# EAGLE board FCM2.1_Manuf (EAGLE 5.11), part 1 of 5
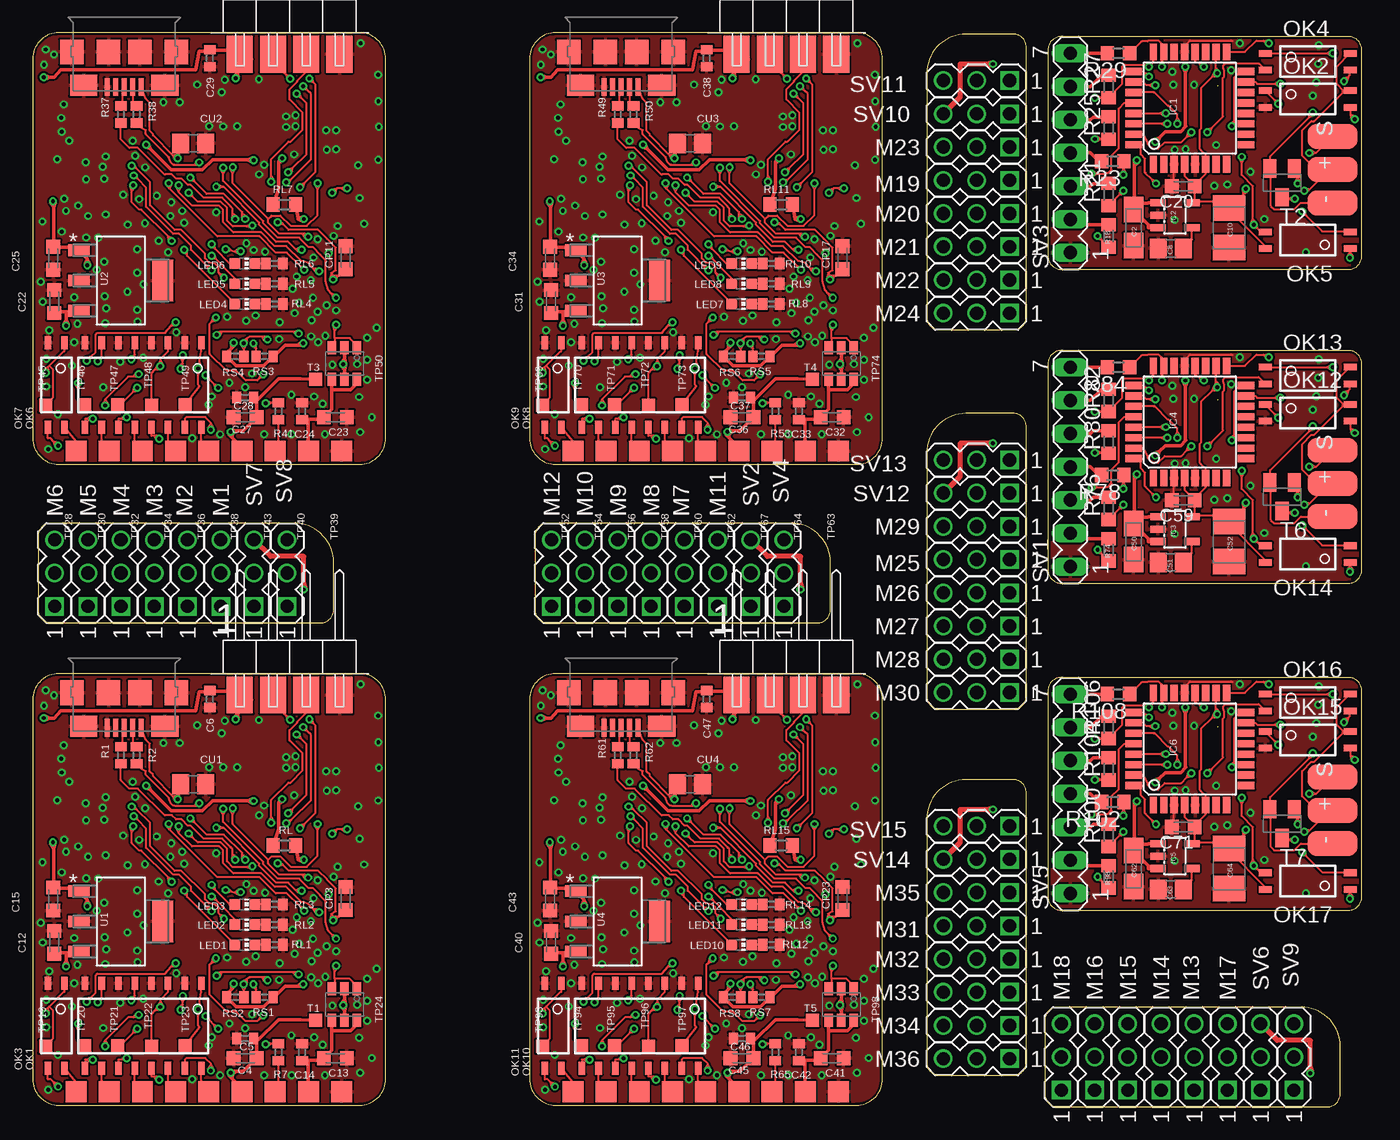
[diagram p0: board, top side]
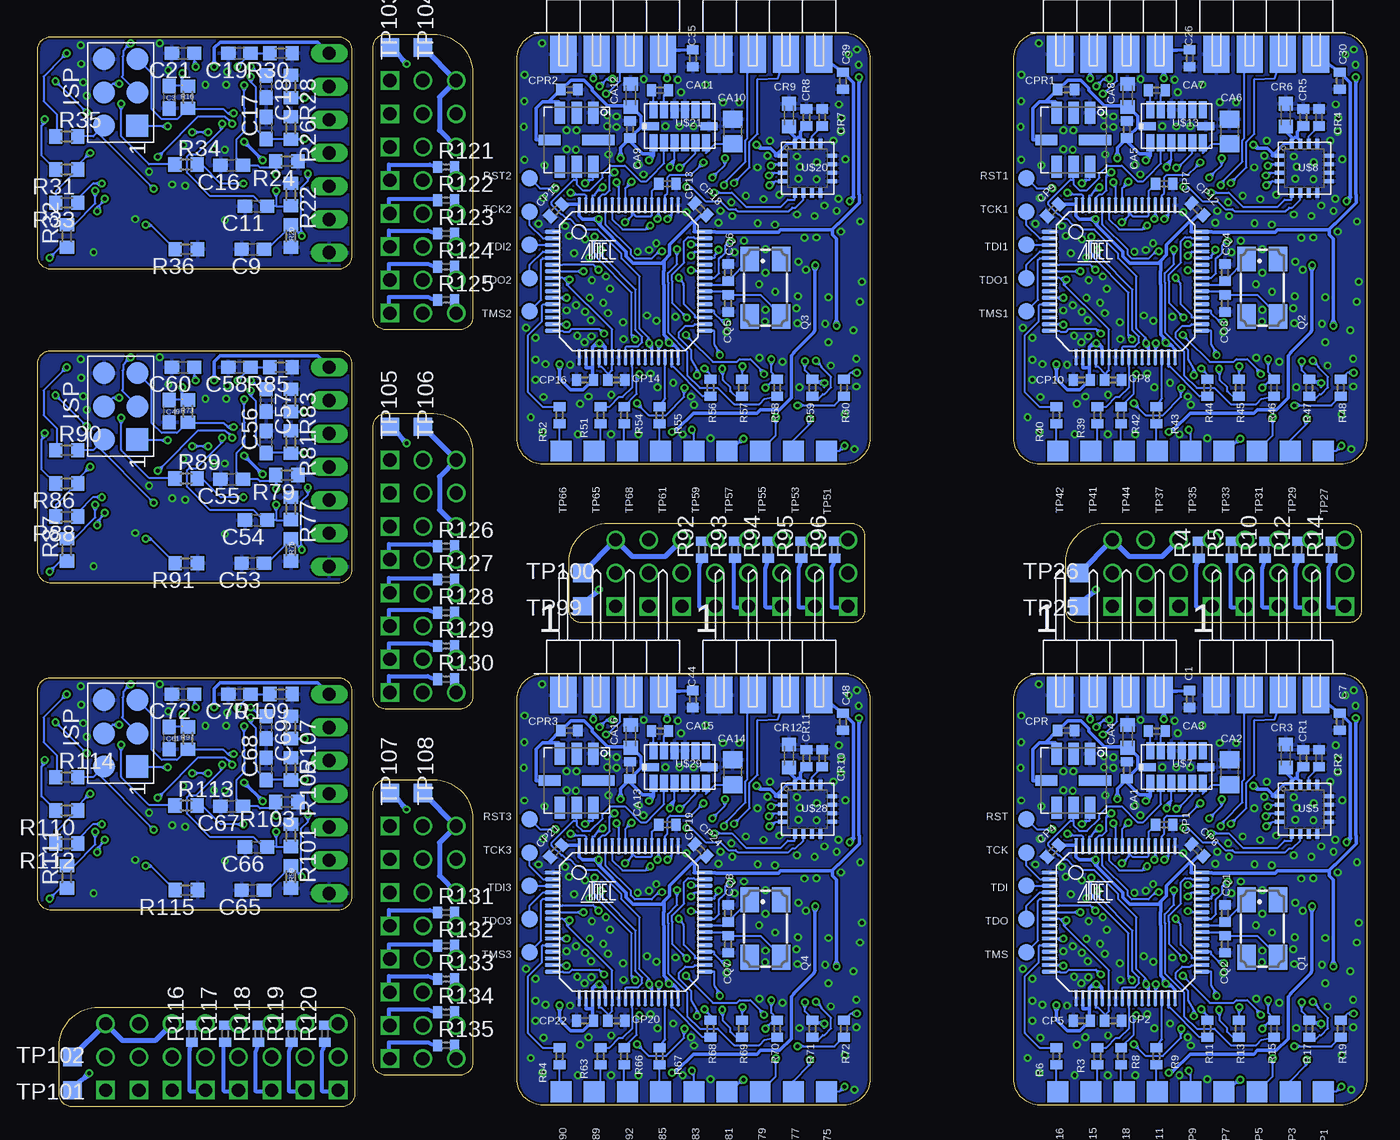
[diagram p1: board, bottom side, seen from below]

Size 101.66 x 82.12 mm. Coordinates in mm from the lower left corner, seen from the top.
Outline: 22.02,37 arc90 23.02,38 23.02,41.62 arc90 20.02,44.62 1.41,44.62 arc90 0.41,43.62 0.41,38 arc90 1.41,37 22.02,37
Outline: 101.66,80.82 arc90 100.66,81.82 78.65,81.82 arc90 77.65,80.82 77.65,65.04 arc90 78.65,64.04 100.66,64.04 arc90 101.66,65.04 101.66,80.82
Outline: 0,2.12 arc90 2,0.12 25,0.12 arc90 27,2.12 27,31.12 arc90 25,33.12 2,33.12 arc90 0,31.12 0,2.12
Outline: 0,51.12 arc90 2,49.12 25,49.12 arc90 27,51.12 27,80.12 arc90 25,82.12 2,82.12 arc90 0,80.12 0,51.12
Outline: 38,51.12 arc90 40,49.12 63,49.12 arc90 65,51.12 65,80.12 arc90 63,82.12 40,82.12 arc90 38,80.12 38,51.12
Outline: 38,2.12 arc90 40,0.12 63,0.12 arc90 65,2.12 65,31.12 arc90 63,33.12 40,33.12 arc90 38,31.12 38,2.12
Outline: 101.66,56.82 arc90 100.66,57.82 78.65,57.82 arc90 77.65,56.82 77.65,41.04 arc90 78.65,40.04 100.66,40.04 arc90 101.66,41.04 101.66,56.82
Outline: 60.02,37 arc90 61.02,38 61.02,41.62 arc90 58.02,44.62 39.41,44.62 arc90 38.41,43.62 38.41,38 arc90 39.41,37 60.02,37
Outline: 101.66,31.82 arc90 100.66,32.82 78.65,32.82 arc90 77.65,31.82 77.65,16.04 arc90 78.65,15.04 100.66,15.04 arc90 101.66,16.04 101.66,31.82
Outline: 99.02,0 arc90 100.02,1 100.02,4.62 arc90 97.02,7.62 78.41,7.62 arc90 77.41,6.62 77.41,1 arc90 78.41,0 99.02,0
Outline: 76,81.02 arc90 75,82.02 71.38,82.02 arc90 68.38,79.02 68.38,60.41 arc90 69.38,59.41 75,59.41 arc90 76,60.41 76,81.02
Outline: 76,52.02 arc90 75,53.02 71.38,53.02 arc90 68.38,50.02 68.38,31.41 arc90 69.38,30.41 75,30.41 arc90 76,31.41 76,52.02
Outline: 76,24.02 arc90 75,25.02 71.38,25.02 arc90 68.38,22.02 68.38,3.41 arc90 69.38,2.41 75,2.41 arc90 76,3.41 76,24.02
Copper layers (1*16): Top 0.035mm / dielectric 1.5mm / Bottom 0.035mm
Design rules "Fischer-LP_BGA": minimum track width 0.15mm, minimum drill 0.3mm, track to track 0.15mm, track to pad 0.15mm, pad to pad 0.15mm, via to via 0.15mm, smd to smd 0mil, copper to edge 0.2mm, drill to drill 0.3mm, minimum pad ring 0.2mm, minimum via ring 0.15mm, stop-mask expansion 0.05mm, vias tented up to drill 0.5mm, thermal gap 0.15mm
Net classes: 1 power: width 0.25 mm; 2 isol: width 0.15 mm, clearance 0.5 mm to class 0, clearance 0.5 mm to class 1

## Footprints (pad centres in the part's own frame; a part is rotated, then mirrored left to right if it is on the bottom)
C0402 = smd 0.7 x 0.9: 1 -0.65,0; 2 0.65,0
A/3216-18R = smd 1.95 x 1.5: + 1.375,0; - -1.375,0
C0603 = smd 1.1 x 1: 1 -0.85,0; 2 0.85,0
C0603K = smd 1.05 x 1.08: 1 -0.875,0; 2 0.875,0
C0805 = smd 1.3 x 1.5: 1 -0.95,0; 2 0.95,0
B/3528-21R = smd 1.95 x 2.5: + 1.525,0; - -1.525,0
TQFP32-08 = smd 1.27 x 0.559: 1 -4.293,2.8; 2 -4.293,2; 3 -4.293,1.2; 4 -4.293,0.4; 5 -4.293,-0.4; 6 -4.293,-1.2; 7 -4.293,-2; 8 -4.293,-2.8; 17 4.293,-2.8; 18 4.293,-2; 19 4.293,-1.2; 20 4.293,-0.4; 21 4.293,0.4; 22 4.293,1.2; 23 4.293,2; 24 4.293,2.8 | smd 0.559 x 1.27: 9 -2.8,-4.293; 10 -2,-4.293; 11 -1.2,-4.293; 12 -0.4,-4.293; 13 0.4,-4.293; 14 1.2,-4.293; 15 2,-4.293; 16 2.8,-4.293; 25 2.8,4.293; 26 2,4.293; 27 1.2,4.293; 28 0.4,4.293; 29 -0.4,4.293; 30 -1.2,4.293; 31 -2,4.293; 32 -2.8,4.293
SOT23-5 = smd 0.55 x 1.2: 1 -0.95,-1.3; 2 0,-1.3; 3 0.95,-1.3; 4 0.95,1.3; 5 -0.95,1.3
3WIRE_CONN = smd 1.905 x 3.81: 0V -2.54,0; 5V 0,0; SIG 2.54,0
CHIP-LED0603 = smd 0.8 x 0.8: A 0,-0.75; C 0,0.75
MA03-1 = drill 1.016 square: 1 -2.54,0 | drill 1.016 round: 2 0,0; 3 2.54,0
MINI-FLAT-16 = smd 1 x 0.5: 1 -3.24,4.445; 2 -3.24,3.175; 3 -3.24,1.905; 4 -3.24,0.635; 5 -3.24,-0.635; 6 -3.24,-1.905; 7 -3.24,-3.175; 8 -3.24,-4.445; 9 3.24,-4.445; 10 3.24,-3.175; 11 3.24,-1.905; 12 3.24,-0.635; 13 3.24,0.635; 14 3.24,1.905; 15 3.24,3.175; 16 3.24,4.445
MINI-FLAT-4 = smd 1 x 0.5: 1 -3.24,0.635; 2 -3.24,-0.635; 3 3.24,-0.635; 4 3.24,0.635
CTS406 = smd 1.9 x 1.4: 1 -2.2,-1.2; 2 2.2,-1.2; 3 2.2,1.2; 4 -2.2,1.2
R0402 = smd 0.7 x 0.9: 1 -0.65,0; 2 0.65,0
R0603 = smd 1 x 1.1: 1 -0.85,0; 2 0.85,0
B1,27 = smd 1.27 x 1.27: TP 0,0
MA07-1 = drill 1.016 long: 1 -7.62,0; 2 -5.08,0; 3 -2.54,0; 4 0,0; 5 2.54,0; 6 5.08,0; 7 7.62,0
SUPERSOT-6 = smd 0.65 x 1: P$1 -0.95,-1.2; P$2 0,-1.2; P$3 0.95,-1.2; P$4 0.95,1.2; P$5 0,1.2; P$6 -0.95,1.2
SOT23-BEC = smd 1 x 1.4: B -0.95,-1.1; C 0,1.1; E 0.95,-1.1
TP16SQ = smd 1.6 x 1.6: TP 0,0
TP10SQ = smd 1 x 1: TP 0,0
TP14SQ = smd 1.4 x 1.4: TP 0,0
SOT230P700X180-4N = smd 1.626 x 0.889: 1 -3.2,2.311; 2 -3.2,0; 3 -3.2,-2.311 | smd 1.626 x 3.175: 4 3.2,0
JEDEC_MS-026 = smd 1.2 x 0.27: P1 -6.06,3.535; P2 -6.06,3.03; P3 -6.06,2.525; P4 -6.06,2.02; P5 -6.06,1.515; P6 -6.06,1.01; P7 -6.06,0.505; P8 -6.06,0; P9 -6.06,-0.505; P10 -6.06,-1.01; P11 -6.06,-1.515; P12 -6.06,-2.02; P13 -6.06,-2.525; P14 -6.06,-3.03; P15 -6.06,-3.535; P16 -6.06,-4.04; P33 5.555,-4.04; P34 5.555,-3.535; P35 5.555,-3.03; P36 5.555,-2.525; P37 5.555,-2.02; P38 5.555,-1.515; P39 5.555,-1.01; P40 5.555,-0.505; P41 5.555,0; P42 5.555,0.505; P43 5.555,1.01; P44 5.555,1.515; P45 5.555,2.02; P46 5.555,2.525; P47 5.555,3.03; P48 5.555,3.535 | smd 0.27 x 1.2: P17 -4.04,-6.06; P18 -3.535,-6.06; P19 -3.03,-6.06; P20 -2.525,-6.06; P21 -2.02,-6.06; P22 -1.515,-6.06; P23 -1.01,-6.06; P24 -0.505,-6.06; P25 0,-6.06; P26 0.505,-6.06; P27 1.01,-6.06; P28 1.515,-6.06; P29 2.02,-6.06; P30 2.525,-6.06; P31 3.03,-6.06; P32 3.535,-6.06; P49 3.535,5.555; P50 3.03,5.555; P51 2.525,5.555; P52 2.02,5.555; P53 1.515,5.555; P54 1.01,5.555; P55 0.505,5.555; P56 0,5.555; P57 -0.505,5.555; P58 -1.01,5.555; P59 -1.515,5.555; P60 -2.02,5.555; P61 -2.525,5.555; P62 -3.03,5.555; P63 -3.535,5.555; P64 -4.04,5.555
ISP_SMD = smd 1.7 x 1.7: 5V -2.54,1.27; GND 2.54,1.27; MISO -2.54,-1.27; MOSI 0,1.27; RESET 2.54,-1.27; SCK 0,-1.27
USB_MICRO = smd 0.4 x 1.35: P$1 3.6,4.125; P$2 4.25,4.125; P$3 4.9,4.125; P$4 5.55,4.125; P$5 6.2,4.125 | smd 1.8 x 1.9: P$6 0.9,1.45; P$7 3.7,1.45; P$8 6.1,1.45; P$9 8.9,1.45 | smd 2.1 x 1.6: P$10 1.8,4; P$11 8,4
LGA16_HAND = smd 0.75 x 0.3: 1 0.125,2.975; 2 0.125,2.325; 3 0.125,1.675; 4 0.125,1.025; 9 3.875,1.025; 10 3.875,1.675; 11 3.875,2.325; 12 3.875,2.975 | smd 0.3 x 0.75: 5 1.025,0.125; 6 1.675,0.125; 7 2.325,0.125; 8 2.975,0.125; 13 2.975,3.875; 14 2.325,3.875; 15 1.675,3.875; 16 1.025,3.875
LGA14_HAND = smd 1.3 x 0.6: 1 -1.25,1.4; 2 -1.25,0.6; 3 -1.25,-0.2; 4 -1.25,-1; 5 -1.25,-1.8; 6 -1.25,-2.6; 8 1.25,-2.6; 9 1.25,-1.8; 10 1.25,-1; 11 1.25,-0.2; 12 1.25,0.6; 13 1.25,1.4 | smd 0.6 x 1.3: 7 0,-2.85; 14 0,1.65
BMP085 = smd 1.67 x 0.8: 1 -2.065,1.27; 2 -2.065,0; 3 -2.065,-1.27; 5 2.065,-1.27; 6 2.065,0; 7 2.065,1.27 | smd 0.8 x 1.67: 4 0,-2.065 | smd 0.8 x 2.5: 8 0,1.65
4WIRE_PIN = smd 2 x 2.8: 1 -2.54,0.254; 2 0,0.254; 3 2.54,0.254; 4 5.08,0.254

## Placement (x,y rotation side)
C1  100n  [C0402]  13.55,31.18 270 bottom
C2  1µ  [A/3216-18R]  84.19,67.21 90 top
C3  100nF  [C0603]  91.59,77.19 270 bottom
C4  2.2uF  [C0603K]  16.25,3.73 180 top
C5  100n  [C0402]  16.25,5.22 180 top
C6  100n  [C0402]  13.55,31.18 270 top
C7  100n  [C0402]  2.06,29.45 270 bottom
C8  470pF  [C0805]  87.05,65.63 180 top
C9  100nF  [C0603]  85.21,65.56 180 bottom
C10  2,2µ  [B/3528-21R]  91.5,67.21 90 top
C11  100nF  [C0603]  84.95,68.87 180 bottom
C12  2.2uF  [C0603K]  1.65,12.57 90 top
C13  2.2uF  [C0603K]  23.15,3.73 0 top
C14  100n  [C0402]  20.6,4.17 90 top
C15  2.2uF  [C0603K]  1.58,15.88 270 top
C16  100nF  [C0603]  86.83,71.99 180 bottom
C17  100nF  [C0603]  84.19,74.83 90 bottom
C18  100nF  [C0603]  84.19,78.01 270 bottom
C19  100nF  [C0603]  86.22,80.55 180 bottom
C20  100nF  [C0603K]  88,70.39 180 top
C21  100nF  [C0603]  90.54,80.55 180 bottom
C22  2.2uF  [C0603K]  1.65,61.58 90 top
C23  2.2uF  [C0603K]  23.15,52.73 0 top
C24  100n  [C0402]  20.6,53.17 90 top
C25  2.2uF  [C0603K]  1.58,64.88 270 top
C26  100n  [C0402]  13.55,80.17 270 bottom
C27  2.2uF  [C0603K]  16.25,52.73 180 top
C28  100n  [C0402]  16.25,54.23 180 top
C29  100n  [C0402]  13.55,80.17 270 top
C30  100n  [C0402]  2.06,78.45 270 bottom
C31  2.2uF  [C0603K]  39.65,61.58 90 top
C32  2.2uF  [C0603K]  61.15,52.73 0 top
C33  100n  [C0402]  58.6,53.17 90 top
C34  2.2uF  [C0603K]  39.58,64.88 270 top
C35  100n  [C0402]  51.55,80.17 270 bottom
C36  2.2uF  [C0603K]  54.25,52.73 180 top
C37  100n  [C0402]  54.25,54.23 180 top
C38  100n  [C0402]  51.55,80.17 270 top
C39  100n  [C0402]  40.06,78.45 270 bottom
C40  2.2uF  [C0603K]  39.65,12.57 90 top
C41  2.2uF  [C0603K]  61.15,3.73 0 top
C42  100n  [C0402]  58.6,4.17 90 top
C43  2.2uF  [C0603K]  39.58,15.88 270 top
C44  100n  [C0402]  51.55,31.18 270 bottom
C45  2.2uF  [C0603K]  54.25,3.73 180 top
C46  100n  [C0402]  54.25,5.22 180 top
C47  100n  [C0402]  51.55,31.18 270 top
C48  100n  [C0402]  40.06,29.45 270 bottom
C49  100nF  [C0603]  91.59,53.19 270 bottom
C50  1µ  [A/3216-18R]  84.19,43.21 90 top
C51  470pF  [C0805]  87.05,41.63 180 top
C52  2,2µ  [B/3528-21R]  91.5,43.21 90 top
C53  100nF  [C0603]  85.21,41.56 180 bottom
C54  100nF  [C0603]  84.95,44.87 180 bottom
C55  100nF  [C0603]  86.83,47.99 180 bottom
C56  100nF  [C0603]  84.19,50.83 90 bottom
C57  100nF  [C0603]  84.19,54.01 270 bottom
C58  100nF  [C0603]  86.22,56.55 180 bottom
C59  100nF  [C0603K]  88,46.39 180 top
C60  100nF  [C0603]  90.54,56.55 180 bottom
C61  100nF  [C0603]  91.59,28.19 270 bottom
C62  1µ  [A/3216-18R]  84.19,18.21 90 top
C63  470pF  [C0805]  87.05,16.63 180 top
C64  2,2µ  [B/3528-21R]  91.5,18.21 90 top
C65  100nF  [C0603]  85.21,16.56 180 bottom
C66  100nF  [C0603]  84.95,19.87 180 bottom
C67  100nF  [C0603]  86.83,22.99 180 bottom
C68  100nF  [C0603]  84.19,25.83 90 bottom
C69  100nF  [C0603]  84.19,29.01 270 bottom
C70  100nF  [C0603]  86.22,31.55 180 bottom
C71  100nF  [C0603K]  88,21.39 180 top
C72  100nF  [C0603]  90.54,31.55 180 bottom
CA1  100n  [C0402]  18.35,25.73 90 bottom
CA2  4µ7  [C0805]  10.5,25.57 90 bottom
CA3  220n  [C0402]  16.05,28.73 0 bottom
CA4  2.2uF  [C0603K]  18.3,28.32 90 bottom
CA5  100n  [C0402]  18.35,74.72 90 bottom
CA6  4µ7  [C0805]  10.5,74.58 90 bottom
CA7  220n  [C0402]  16.05,77.72 0 bottom
CA8  2.2uF  [C0603K]  18.3,77.33 90 bottom
CA9  100n  [C0402]  56.35,74.72 90 bottom
CA10  4µ7  [C0805]  48.5,74.58 90 bottom
CA11  220n  [C0402]  54.05,77.72 0 bottom
CA12  2.2uF  [C0603K]  56.3,77.33 90 bottom
CA13  100n  [C0402]  56.35,25.73 90 bottom
CA14  4µ7  [C0805]  48.5,25.57 90 bottom
CA15  220n  [C0402]  54.05,28.73 0 bottom
CA16  2.2uF  [C0603K]  56.3,28.32 90 bottom
CP1  100n  [C0402]  15.5,21.57 0 bottom
CP2  100n  [C0402]  19.4,6.58 0 bottom
CP3  2.2uF  [C0603K]  23.94,15.92 90 top
CP4  100n  [C0402]  24.01,19.56 225 bottom
CP5  100n  [C0402]  21.8,6.58 180 bottom
CP6  100n  [C0402]  12.95,19.62 135 bottom
CP7  100n  [C0402]  15.5,70.58 0 bottom
CP8  100n  [C0402]  19.4,55.58 0 bottom
CP9  100n  [C0402]  24.01,68.56 225 bottom
CP10  100n  [C0402]  21.8,55.58 180 bottom
CP11  2.2uF  [C0603K]  23.94,64.92 90 top
CP12  100n  [C0402]  12.95,68.62 135 bottom
CP13  100n  [C0402]  53.5,70.58 0 bottom
CP14  100n  [C0402]  57.4,55.58 0 bottom
CP15  100n  [C0402]  62.01,68.56 225 bottom
CP16  100n  [C0402]  59.8,55.58 180 bottom
CP17  2.2uF  [C0603K]  61.94,64.92 90 top
CP18  100n  [C0402]  50.95,68.62 135 bottom
CP19  100n  [C0402]  53.5,21.57 0 bottom
CP20  100n  [C0402]  57.4,6.58 0 bottom
CP21  100n  [C0402]  62.01,19.56 225 bottom
CP22  100n  [C0402]  59.8,6.58 180 bottom
CP23  2.2uF  [C0603K]  61.94,15.92 90 top
CP24  100n  [C0402]  50.95,19.62 135 bottom
CPR  100n  [C0402]  23,28.77 0 bottom
CPR1  100n  [C0402]  23,77.78 0 bottom
CPR2  100n  [C0402]  61,77.78 0 bottom
CPR3  100n  [C0402]  61,28.77 0 bottom
CQ1  18pF  [C0402]  10.85,14.79 270 bottom
CQ2  18pF  [C0402]  10.85,12.43 90 bottom
CQ3  18pF  [C0402]  10.85,61.42 90 bottom
CQ4  18pF  [C0402]  10.85,63.78 270 bottom
CQ5  18pF  [C0402]  48.85,61.42 90 bottom
CQ6  18pF  [C0402]  48.85,63.78 270 bottom
CQ7  18pF  [C0402]  48.85,12.43 90 bottom
CQ8  18pF  [C0402]  48.85,14.79 270 bottom
CR1  100n  [C0402]  4.85,26.64 90 bottom
CR2  10n 25V  [C0402]  3.65,26.64 270 bottom
CR3  2.2uF  [C0603K]  6.2,26.82 90 bottom
CR4  10n 25V  [C0402]  3.65,75.64 270 bottom
CR5  100n  [C0402]  4.85,75.64 90 bottom
CR6  2.2uF  [C0603K]  6.2,75.83 90 bottom
CR7  10n 25V  [C0402]  41.65,75.64 270 bottom
CR8  100n  [C0402]  42.85,75.64 90 bottom
CR9  2.2uF  [C0603K]  44.2,75.83 90 bottom
CR10  10n 25V  [C0402]  41.65,26.64 270 bottom
CR11  100n  [C0402]  42.85,26.64 90 bottom
CR12  2.2uF  [C0603K]  44.2,26.82 90 bottom
CU1  4µ7  [C0805]  12.27,24.66 0 top
CU2  4µ7  [C0805]  12.27,73.67 0 top
CU3  4µ7  [C0805]  50.27,73.67 0 top
CU4  4µ7  [C0805]  50.27,24.66 0 top
IC1  MEGA8-AI  [TQFP32-08]  88.51,76.36 90 top
IC2  IRU1205_30 / LP3985-3.3  [SOT23-5]  87.37,68.17 270 top
IC3  IRU1205_30 / LP3985-3.3  [SOT23-5]  87.37,44.17 270 top
IC4  MEGA8-AI  [TQFP32-08]  88.51,52.36 90 top
IC5  IRU1205_30 / LP3985-3.3  [SOT23-5]  87.37,19.17 270 top
IC6  MEGA8-AI  [TQFP32-08]  88.51,27.36 90 top
IN1  [3WIRE_CONN]  99.43,47.66 90 top
IN2  [3WIRE_CONN]  99.43,22.66 90 top
IN3  [3WIRE_CONN]  99.43,71.66 90 top
LED1  red  [CHIP-LED0603]  16.23,12.38 270 top
LED2  green  [CHIP-LED0603]  16.23,13.93 270 top
LED3  blue  [CHIP-LED0603]  16.23,15.47 270 top
LED4  red  [CHIP-LED0603]  16.23,61.38 270 top
LED5  green  [CHIP-LED0603]  16.23,62.93 270 top
LED6  blue  [CHIP-LED0603]  16.23,64.47 270 top
LED7  red  [CHIP-LED0603]  54.23,61.38 270 top
LED8  green  [CHIP-LED0603]  54.23,62.93 270 top
LED9  blue  [CHIP-LED0603]  54.23,64.47 270 top
LED10  red  [CHIP-LED0603]  54.23,12.38 270 top
LED11  green  [CHIP-LED0603]  54.23,13.93 270 top
LED12  blue  [CHIP-LED0603]  54.23,15.47 270 top
M1  [MA03-1]  14.38,40.81 90 top
M2  [MA03-1]  11.84,40.81 90 top
M3  [MA03-1]  9.3,40.81 90 top
M4  [MA03-1]  6.76,40.81 90 top
M5  [MA03-1]  4.22,40.81 90 top
M6  [MA03-1]  1.68,40.81 90 top
M7  [MA03-1]  49.84,40.81 90 top
M8  [MA03-1]  47.3,40.81 90 top
M9  [MA03-1]  44.76,40.81 90 top
M10  [MA03-1]  42.22,40.81 90 top
M11  [MA03-1]  52.38,40.81 90 top
M12  [MA03-1]  39.68,40.81 90 top
M13  [MA03-1]  88.84,3.81 90 top
M14  [MA03-1]  86.3,3.81 90 top
M15  [MA03-1]  83.76,3.81 90 top
M16  [MA03-1]  81.22,3.81 90 top
M17  [MA03-1]  91.38,3.81 90 top
M18  [MA03-1]  78.68,3.81 90 top
M19  [MA03-1]  72.19,70.84 180 top
M20  [MA03-1]  72.19,68.3 180 top
M21  [MA03-1]  72.19,65.76 180 top
M22  [MA03-1]  72.19,63.22 180 top
M23  [MA03-1]  72.19,73.38 180 top
M24  [MA03-1]  72.19,60.68 180 top
M25  [MA03-1]  72.19,41.84 180 top
M26  [MA03-1]  72.19,39.3 180 top
M27  [MA03-1]  72.19,36.76 180 top
M28  [MA03-1]  72.19,34.22 180 top
M29  [MA03-1]  72.19,44.38 180 top
M30  [MA03-1]  72.19,31.68 180 top
M31  [MA03-1]  72.19,13.84 180 top
M32  [MA03-1]  72.19,11.3 180 top
M33  [MA03-1]  72.19,8.76 180 top
M34  [MA03-1]  72.19,6.22 180 top
M35  [MA03-1]  72.19,16.38 180 top
M36  [MA03-1]  72.19,3.68 180 top
OK1  TLP283-4  [MINI-FLAT-16]  8.46,6.19 270 top
OK2  TLP283  [MINI-FLAT-4]  97.53,77.06 0 top
OK3  TLP283  [MINI-FLAT-4]  1.8,6.19 270 top
OK4  TLP283  [MINI-FLAT-4]  97.53,79.91 0 top
OK5  TLP283  [MINI-FLAT-4]  97.53,66.26 180 top
OK6  TLP283-4  [MINI-FLAT-16]  8.46,55.19 270 top
OK7  TLP283  [MINI-FLAT-4]  1.8,55.19 270 top
OK8  TLP283-4  [MINI-FLAT-16]  46.45,55.19 270 top
OK9  TLP283  [MINI-FLAT-4]  39.8,55.19 270 top
OK10  TLP283-4  [MINI-FLAT-16]  46.45,6.19 270 top
OK11  TLP283  [MINI-FLAT-4]  39.8,6.19 270 top
OK12  TLP283  [MINI-FLAT-4]  97.53,53.06 0 top
OK13  TLP283  [MINI-FLAT-4]  97.53,55.91 0 top
OK14  TLP283  [MINI-FLAT-4]  97.53,42.26 180 top
OK15  TLP283  [MINI-FLAT-4]  97.53,28.06 0 top
OK16  TLP283  [MINI-FLAT-4]  97.53,30.91 0 top
OK17  TLP283  [MINI-FLAT-4]  97.53,17.26 180 top
Q1  8MHz  [CTS406]  8,13.62 270 bottom
Q2  8MHz  [CTS406]  8,62.62 270 bottom
Q3  8MHz  [CTS406]  46,62.62 270 bottom
Q4  8MHz  [CTS406]  46,13.62 270 bottom
R1  39  [R0402]  6.75,26.88 90 top
R2  39  [R0402]  7.95,26.88 90 top
R3  2k2  [R0402]  20.6,3.88 270 bottom
R4  [R0402]  12.86,42.59 90 bottom
R5  [R0402]  10.32,42.59 90 bottom
R6  2k2  [R0402]  23.75,3.88 270 bottom
R7  2k2  [R0402]  18.8,4.17 270 top
R8  2k2  [R0402]  18.8,3.88 270 bottom
R9  2k2  [R0402]  16.1,3.88 270 bottom
R10  [R0402]  7.78,42.59 90 bottom
R11  330  [R0402]  12.2,5.97 90 bottom
R12  [R0402]  5.24,42.59 90 bottom
R13  330  [R0402]  9.8,5.97 90 bottom
R14  [R0402]  2.7,42.59 90 bottom
R15  330  [R0402]  7.1,5.97 90 bottom
R16  10k  [R0603]  90.17,77.19 90 bottom
R17  330  [R0402]  4.4,5.97 90 bottom
R18  10k  [R0603]  82.29,66.58 90 top
R19  330  [R0402]  2,5.97 90 bottom
R20  10k  [R0603]  82.29,66.58 90 bottom
R21  10k  [R0603]  82.29,69.75 90 top
R22  10k  [R0603]  82.29,69.75 270 bottom
R23  10k  [R0603]  82.61,72.29 180 top
R24  10k  [R0603]  82.61,72.29 180 bottom
R25  10k  [R0603]  82.29,74.83 90 top
R26  10k  [R0603]  82.29,74.83 270 bottom
R27  10k  [R0603]  82.29,78.01 90 top
R28  10k  [R0603]  82.29,78.01 270 bottom
R29  10k  [R0603]  83.05,80.55 180 top
R30  10k  [R0603]  83.05,80.55 180 bottom
R31  2k2  [R0603]  99.43,71.66 180 bottom
R32  470  [R0603]  99.43,66.58 90 bottom
R33  47k  [R0603]  99.43,69.12 180 bottom
R34  470  [R0603]  90.31,72.04 0 bottom
R35  470  [R0603]  99.43,74.2 0 bottom
R36  10k  [R0603]  90.29,65.56 180 bottom
R37  39  [R0402]  6.75,75.88 90 top
R38  39  [R0402]  7.95,75.88 90 top
R39  2k2  [R0402]  20.6,52.88 270 bottom
R40  2k2  [R0402]  23.75,52.88 270 bottom
R41  2k2  [R0402]  18.8,53.17 270 top
R42  2k2  [R0402]  18.8,52.88 270 bottom
R43  2k2  [R0402]  16.1,52.88 270 bottom
R44  330  [R0402]  12.2,54.98 90 bottom
R45  330  [R0402]  9.8,54.98 90 bottom
R46  330  [R0402]  7.1,54.98 90 bottom
R47  330  [R0402]  4.4,54.98 90 bottom
R48  330  [R0402]  2,54.98 90 bottom
R49  39  [R0402]  44.75,75.88 90 top
R50  39  [R0402]  45.95,75.88 90 top
R51  2k2  [R0402]  58.6,52.88 270 bottom
R52  2k2  [R0402]  61.75,52.88 270 bottom
R53  2k2  [R0402]  56.8,53.17 270 top
R54  2k2  [R0402]  56.8,52.88 270 bottom
R55  2k2  [R0402]  54.1,52.88 270 bottom
R56  330  [R0402]  50.2,54.98 90 bottom
R57  330  [R0402]  47.8,54.98 90 bottom
R58  330  [R0402]  45.1,54.98 90 bottom
R59  330  [R0402]  42.4,54.98 90 bottom
R60  330  [R0402]  40,54.98 90 bottom
R61  39  [R0402]  44.75,26.88 90 top
R62  39  [R0402]  45.95,26.88 90 top
R63  2k2  [R0402]  58.6,3.88 270 bottom
R64  2k2  [R0402]  61.75,3.88 270 bottom
R65  2k2  [R0402]  56.8,4.17 270 top
R66  2k2  [R0402]  56.8,3.88 270 bottom
R67  2k2  [R0402]  54.1,3.88 270 bottom
R68  330  [R0402]  50.2,5.97 90 bottom
R69  330  [R0402]  47.8,5.97 90 bottom
R70  330  [R0402]  45.1,5.97 90 bottom
R71  330  [R0402]  42.4,5.97 90 bottom
R72  330  [R0402]  40,5.97 90 bottom
R73  10k  [R0603]  90.17,53.19 90 bottom
R74  10k  [R0603]  82.29,42.58 90 top
R75  10k  [R0603]  82.29,42.58 90 bottom
R76  10k  [R0603]  82.29,45.75 90 top
R77  10k  [R0603]  82.29,45.75 270 bottom
R78  10k  [R0603]  82.61,48.29 180 top
R79  10k  [R0603]  82.61,48.29 180 bottom
R80  10k  [R0603]  82.29,50.83 90 top
R81  10k  [R0603]  82.29,50.83 270 bottom
R82  10k  [R0603]  82.29,54.01 90 top
R83  10k  [R0603]  82.29,54.01 270 bottom
R84  10k  [R0603]  83.05,56.55 180 top
R85  10k  [R0603]  83.05,56.55 180 bottom
R86  2k2  [R0603]  99.43,47.66 180 bottom
R87  470  [R0603]  99.43,42.58 90 bottom
R88  47k  [R0603]  99.43,45.12 180 bottom
R89  470  [R0603]  90.31,48.04 0 bottom
R90  470  [R0603]  99.43,50.2 0 bottom
R91  10k  [R0603]  90.29,41.56 180 bottom
R92  [R0402]  50.86,42.59 90 bottom
R93  [R0402]  48.32,42.59 90 bottom
R94  [R0402]  45.78,42.59 90 bottom
R95  [R0402]  43.24,42.59 90 bottom
R96  [R0402]  40.7,42.59 90 bottom
R97  10k  [R0603]  90.17,28.19 90 bottom
R98  10k  [R0603]  82.29,17.58 90 top
R99  10k  [R0603]  82.29,17.58 90 bottom
R100  10k  [R0603]  82.29,20.75 90 top
R101  10k  [R0603]  82.29,20.75 270 bottom
R102  10k  [R0603]  82.61,23.29 180 top
R103  10k  [R0603]  82.61,23.29 180 bottom
R104  10k  [R0603]  82.29,25.83 90 top
R105  10k  [R0603]  82.29,25.83 270 bottom
R106  10k  [R0603]  82.29,29.01 90 top
R107  10k  [R0603]  82.29,29.01 270 bottom
R108  10k  [R0603]  83.05,31.55 180 top
R109  10k  [R0603]  83.05,31.55 180 bottom
R110  2k2  [R0603]  99.43,22.66 180 bottom
R111  470  [R0603]  99.43,17.58 90 bottom
R112  47k  [R0603]  99.43,20.12 180 bottom
R113  470  [R0603]  90.31,23.04 0 bottom
R114  470  [R0603]  99.43,25.2 0 bottom
R115  10k  [R0603]  90.29,16.56 180 bottom
R116  [R0402]  89.86,5.59 90 bottom
R117  [R0402]  87.32,5.59 90 bottom
R118  [R0402]  84.78,5.59 90 bottom
R119  [R0402]  82.24,5.59 90 bottom
R120  [R0402]  79.7,5.59 90 bottom
R121  [R0402]  70.41,71.86 0 bottom
R122  [R0402]  70.41,69.32 0 bottom
R123  [R0402]  70.41,66.78 0 bottom
R124  [R0402]  70.41,64.24 0 bottom
R125  [R0402]  70.41,61.7 0 bottom
R126  [R0402]  70.41,42.86 0 bottom
R127  [R0402]  70.41,40.32 0 bottom
R128  [R0402]  70.41,37.78 0 bottom
R129  [R0402]  70.41,35.24 0 bottom
R130  [R0402]  70.41,32.7 0 bottom
R131  [R0402]  70.41,14.86 0 bottom
R132  [R0402]  70.41,12.32 0 bottom
R133  [R0402]  70.41,9.78 0 bottom
R134  [R0402]  70.41,7.24 0 bottom
R135  [R0402]  70.41,4.7 0 bottom
RL  [R0603]  19.25,19.98 180 top
RL1  330  [R0402]  18.49,12.38 180 top
RL2  330  [R0402]  18.49,13.93 180 top
RL3  330  [R0402]  18.49,15.47 180 top
RL4  330  [R0402]  18.49,61.38 180 top
RL5  330  [R0402]  18.49,62.93 180 top
RL6  330  [R0402]  18.49,64.47 180 top
RL7  [R0603]  19.25,68.97 180 top
RL8  330  [R0402]  56.49,61.38 180 top
RL9  330  [R0402]  56.49,62.93 180 top
RL10  330  [R0402]  56.49,64.47 180 top
RL11  [R0603]  57.25,68.97 180 top
RL12  330  [R0402]  56.49,12.38 180 top
RL13  330  [R0402]  56.49,13.93 180 top
RL14  330  [R0402]  56.49,15.47 180 top
RL15  [R0603]  57.25,19.98 180 top
RS1  2k2  [R0402]  17.75,8.38 0 top
RS2  2k2  [R0402]  15.5,8.38 180 top
RS3  2k2  [R0402]  17.75,57.38 0 top
RS4  2k2  [R0402]  15.5,57.38 180 top
RS5  2k2  [R0402]  55.75,57.38 0 top
RS6  2k2  [R0402]  53.5,57.38 180 top
RS7  2k2  [R0402]  55.75,8.38 0 top
RS8  2k2  [R0402]  53.5,8.38 180 top
RST  TPB1,27  [B1,27]  26.02,21.98 0 bottom
RST1  TPB1,27  [B1,27]  26.02,70.98 0 bottom
RST2  TPB1,27  [B1,27]  64.03,70.98 0 bottom
RST3  TPB1,27  [B1,27]  64.03,21.98 0 bottom
SV1  [MA07-1]  79.37,48.93 90 top
SV2  [MA03-1]  54.92,40.81 90 top
SV3  [MA07-1]  79.37,72.93 90 top
SV4  [MA03-1]  57.46,40.81 90 top
SV5  [MA07-1]  79.37,23.93 90 top
SV6  [MA03-1]  93.92,3.81 90 top
SV7  [MA03-1]  16.92,40.81 90 top
SV8  [MA03-1]  19.46,40.81 90 top
SV9  [MA03-1]  96.46,3.81 90 top
SV10  [MA03-1]  72.19,75.92 180 top
SV11  [MA03-1]  72.19,78.46 180 top
SV12  [MA03-1]  72.19,46.92 180 top
SV13  [MA03-1]  72.19,49.46 180 top
SV14  [MA03-1]  72.19,18.92 180 top
SV15  [MA03-1]  72.19,21.46 180 top
T1  QS6J1=FDC6312P  [SUPERSOT-6]  23.85,7.83 180 top
T2  [SOT23-BEC]  95.56,70.64 180 top
T3  QS6J1=FDC6312P  [SUPERSOT-6]  23.85,56.83 180 top
T4  QS6J1=FDC6312P  [SUPERSOT-6]  61.85,56.83 180 top
T5  QS6J1=FDC6312P  [SUPERSOT-6]  61.85,7.83 180 top
T6  [SOT23-BEC]  95.56,46.64 180 top
T7  [SOT23-BEC]  95.56,21.64 180 top
TCK  TPB1,27  [B1,27]  26.02,19.44 0 bottom
TCK1  TPB1,27  [B1,27]  26.02,68.44 0 bottom
TCK2  TPB1,27  [B1,27]  64.03,68.44 0 bottom
TCK3  TPB1,27  [B1,27]  64.03,19.44 0 bottom
TDI  TPB1,27  [B1,27]  26.02,16.9 0 bottom
TDI1  TPB1,27  [B1,27]  26.02,65.9 0 bottom
TDI2  TPB1,27  [B1,27]  64.03,65.9 0 bottom
TDI3  TPB1,27  [B1,27]  64.03,16.9 0 bottom
TDO  TPB1,27  [B1,27]  26.02,14.36 0 bottom
TDO1  TPB1,27  [B1,27]  26.02,63.36 0 bottom
TDO2  TPB1,27  [B1,27]  64.03,63.36 0 bottom
TDO3  TPB1,27  [B1,27]  64.03,14.36 0 bottom
TMS  TPB1,27  [B1,27]  26.02,11.82 0 bottom
TMS1  TPB1,27  [B1,27]  26.02,60.82 0 bottom
TMS2  TPB1,27  [B1,27]  64.03,60.82 0 bottom
TMS3  TPB1,27  [B1,27]  64.03,11.82 0 bottom
TP1  TPSQTP16SQ  [TP16SQ]  3.31,1.14 270 bottom
TP2  TPSQTP16SQ  [TP16SQ]  3.31,1.14 90 top
TP3  TPSQTP16SQ  [TP16SQ]  5.85,1.14 270 bottom
TP4  TPSQTP16SQ  [TP16SQ]  5.85,1.14 90 top
TP5  TPSQTP16SQ  [TP16SQ]  8.39,1.14 270 bottom
TP6  TPSQTP16SQ  [TP16SQ]  8.39,1.14 90 top
TP7  TPSQTP16SQ  [TP16SQ]  10.93,1.14 270 bottom
TP8  TPSQTP16SQ  [TP16SQ]  10.93,1.14 90 top
TP9  TPSQTP16SQ  [TP16SQ]  13.47,1.14 270 bottom
TP10  TPSQTP16SQ  [TP16SQ]  13.47,1.14 90 top
TP11  TPSQTP16SQ  [TP16SQ]  16.01,1.14 270 bottom
TP12  TPSQTP16SQ  [TP16SQ]  16.01,1.14 90 top
TP13  TPSQTP16SQ  [TP16SQ]  23.63,1.14 90 top
TP14  TPSQTP16SQ  [TP16SQ]  21.09,1.14 90 top
TP15  TPSQTP16SQ  [TP16SQ]  21.09,1.14 270 bottom
TP16  TPSQTP16SQ  [TP16SQ]  23.63,1.14 270 bottom
TP17  TPSQTP16SQ  [TP16SQ]  18.55,1.14 90 top
TP18  TPSQTP16SQ  [TP16SQ]  18.55,1.14 270 bottom
TP19  TPSQTP10SQ  [TP10SQ]  1,4.62 90 top
TP20  TPSQTP10SQ  [TP10SQ]  3.97,4.67 90 top
TP21  TPSQTP10SQ  [TP10SQ]  6.5,4.67 90 top
TP22  TPSQTP10SQ  [TP10SQ]  9.1,4.62 90 top
TP23  TPSQTP10SQ  [TP10SQ]  11.65,4.67 90 top
TP24  TPSQTP10SQ  [TP10SQ]  21.65,6.62 90 top
TP25  TPSQTP14SQ  [TP14SQ]  22,38.27 0 bottom
TP26  TPSQTP14SQ  [TP14SQ]  22,40.81 0 bottom
TP27  TPSQTP16SQ  [TP16SQ]  3.31,50.14 270 bottom
TP28  TPSQTP16SQ  [TP16SQ]  3.31,50.14 90 top
TP29  TPSQTP16SQ  [TP16SQ]  5.85,50.14 270 bottom
TP30  TPSQTP16SQ  [TP16SQ]  5.85,50.14 90 top
TP31  TPSQTP16SQ  [TP16SQ]  8.39,50.14 270 bottom
TP32  TPSQTP16SQ  [TP16SQ]  8.39,50.14 90 top
TP33  TPSQTP16SQ  [TP16SQ]  10.93,50.14 270 bottom
TP34  TPSQTP16SQ  [TP16SQ]  10.93,50.14 90 top
TP35  TPSQTP16SQ  [TP16SQ]  13.47,50.14 270 bottom
TP36  TPSQTP16SQ  [TP16SQ]  13.47,50.14 90 top
TP37  TPSQTP16SQ  [TP16SQ]  16.01,50.14 270 bottom
TP38  TPSQTP16SQ  [TP16SQ]  16.01,50.14 90 top
TP39  TPSQTP16SQ  [TP16SQ]  23.63,50.14 90 top
TP40  TPSQTP16SQ  [TP16SQ]  21.09,50.14 90 top
TP41  TPSQTP16SQ  [TP16SQ]  21.09,50.14 270 bottom
TP42  TPSQTP16SQ  [TP16SQ]  23.63,50.14 270 bottom
TP43  TPSQTP16SQ  [TP16SQ]  18.55,50.14 90 top
TP44  TPSQTP16SQ  [TP16SQ]  18.55,50.14 270 bottom
TP45  TPSQTP10SQ  [TP10SQ]  1,53.62 90 top
TP46  TPSQTP10SQ  [TP10SQ]  3.97,53.67 90 top
TP47  TPSQTP10SQ  [TP10SQ]  6.5,53.67 90 top
TP48  TPSQTP10SQ  [TP10SQ]  9.1,53.62 90 top
TP49  TPSQTP10SQ  [TP10SQ]  11.65,53.67 90 top
TP50  TPSQTP10SQ  [TP10SQ]  21.65,55.62 90 top
TP51  TPSQTP16SQ  [TP16SQ]  41.31,50.14 270 bottom
TP52  TPSQTP16SQ  [TP16SQ]  41.31,50.14 90 top
TP53  TPSQTP16SQ  [TP16SQ]  43.85,50.14 270 bottom
TP54  TPSQTP16SQ  [TP16SQ]  43.85,50.14 90 top
TP55  TPSQTP16SQ  [TP16SQ]  46.39,50.14 270 bottom
TP56  TPSQTP16SQ  [TP16SQ]  46.39,50.14 90 top
TP57  TPSQTP16SQ  [TP16SQ]  48.93,50.14 270 bottom
TP58  TPSQTP16SQ  [TP16SQ]  48.93,50.14 90 top
TP59  TPSQTP16SQ  [TP16SQ]  51.47,50.14 270 bottom
TP60  TPSQTP16SQ  [TP16SQ]  51.47,50.14 90 top
TP61  TPSQTP16SQ  [TP16SQ]  54.01,50.14 270 bottom
TP62  TPSQTP16SQ  [TP16SQ]  54.01,50.14 90 top
TP63  TPSQTP16SQ  [TP16SQ]  61.63,50.14 90 top
TP64  TPSQTP16SQ  [TP16SQ]  59.09,50.14 90 top
TP65  TPSQTP16SQ  [TP16SQ]  59.09,50.14 270 bottom
TP66  TPSQTP16SQ  [TP16SQ]  61.63,50.14 270 bottom
TP67  TPSQTP16SQ  [TP16SQ]  56.55,50.14 90 top
TP68  TPSQTP16SQ  [TP16SQ]  56.55,50.14 270 bottom
TP69  TPSQTP10SQ  [TP10SQ]  39,53.62 90 top
TP70  TPSQTP10SQ  [TP10SQ]  41.97,53.67 90 top
TP71  TPSQTP10SQ  [TP10SQ]  44.5,53.67 90 top
TP72  TPSQTP10SQ  [TP10SQ]  47.1,53.62 90 top
TP73  TPSQTP10SQ  [TP10SQ]  49.65,53.67 90 top
TP74  TPSQTP10SQ  [TP10SQ]  59.65,55.62 90 top
TP75  TPSQTP16SQ  [TP16SQ]  41.31,1.14 270 bottom
TP76  TPSQTP16SQ  [TP16SQ]  41.31,1.14 90 top
TP77  TPSQTP16SQ  [TP16SQ]  43.85,1.14 270 bottom
TP78  TPSQTP16SQ  [TP16SQ]  43.85,1.14 90 top
TP79  TPSQTP16SQ  [TP16SQ]  46.39,1.14 270 bottom
TP80  TPSQTP16SQ  [TP16SQ]  46.39,1.14 90 top
TP81  TPSQTP16SQ  [TP16SQ]  48.93,1.14 270 bottom
TP82  TPSQTP16SQ  [TP16SQ]  48.93,1.14 90 top
TP83  TPSQTP16SQ  [TP16SQ]  51.47,1.14 270 bottom
TP84  TPSQTP16SQ  [TP16SQ]  51.47,1.14 90 top
TP85  TPSQTP16SQ  [TP16SQ]  54.01,1.14 270 bottom
TP86  TPSQTP16SQ  [TP16SQ]  54.01,1.14 90 top
TP87  TPSQTP16SQ  [TP16SQ]  61.63,1.14 90 top
TP88  TPSQTP16SQ  [TP16SQ]  59.09,1.14 90 top
TP89  TPSQTP16SQ  [TP16SQ]  59.09,1.14 270 bottom
TP90  TPSQTP16SQ  [TP16SQ]  61.63,1.14 270 bottom
TP91  TPSQTP16SQ  [TP16SQ]  56.55,1.14 90 top
TP92  TPSQTP16SQ  [TP16SQ]  56.55,1.14 270 bottom
TP93  TPSQTP10SQ  [TP10SQ]  39,4.62 90 top
TP94  TPSQTP10SQ  [TP10SQ]  41.97,4.67 90 top
TP95  TPSQTP10SQ  [TP10SQ]  44.5,4.67 90 top
TP96  TPSQTP10SQ  [TP10SQ]  47.1,4.62 90 top
TP97  TPSQTP10SQ  [TP10SQ]  49.65,4.67 90 top
TP98  TPSQTP10SQ  [TP10SQ]  59.65,6.62 90 top
TP99  TPSQTP14SQ  [TP14SQ]  60,38.27 0 bottom
TP100  TPSQTP14SQ  [TP14SQ]  60,40.81 0 bottom
TP101  TPSQTP14SQ  [TP14SQ]  99,1.27 0 bottom
TP102  TPSQTP14SQ  [TP14SQ]  99,3.81 0 bottom
TP103  TPSQTP14SQ  [TP14SQ]  74.73,81 270 bottom
TP104  TPSQTP14SQ  [TP14SQ]  72.19,81 270 bottom
TP105  TPSQTP14SQ  [TP14SQ]  74.73,52 270 bottom
TP106  TPSQTP14SQ  [TP14SQ]  72.19,52 270 bottom
TP107  TPSQTP14SQ  [TP14SQ]  74.73,24 270 bottom
TP108  TPSQTP14SQ  [TP14SQ]  72.19,24 270 bottom
U1  MCP1824ST-3302E/DB  [SOT230P700X180-4N]  6.75,14.18 0 top
U2  MCP1824ST-3302E/DB  [SOT230P700X180-4N]  6.75,63.17 0 top
U3  MCP1824ST-3302E/DB  [SOT230P700X180-4N]  44.75,63.17 0 top
U4  MCP1824ST-3302E/DB  [SOT230P700X180-4N]  44.75,14.18 0 top
U$1  AT32UC3B0  [JEDEC_MS-026]  18.2,14.38 0 bottom
U$2  ISPSMD  [ISP_SMD]  95.31,77.56 90 bottom
U$3  AT32UC3B0  [JEDEC_MS-026]  18.2,63.38 0 bottom
U$4  UBB_MICRO_HIROSE  [USB_MICRO]  11.9,33.1 180 top
U$5  L3G4200DHAND  [LGA16_HAND]  6.78,20.75 0 bottom
U$6  UBB_MICRO_HIROSE  [USB_MICRO]  11.9,82.1 180 top
U$7  LSM303HAND  [LGA14_HAND]  15.15,25.98 90 bottom
U$8  L3G4200DHAND  [LGA16_HAND]  6.78,69.75 0 bottom
U$9  BMP085  [BMP085]  22.44,24.93 270 bottom
U$10  4WIRE_CONN  [4WIRE_PIN]  20.92,31.22 0 bottom
U$11  4WIRE_CONN  [4WIRE_PIN]  18.38,31.22 0 top
U$12  4WIRE_CONN  [4WIRE_PIN]  8.96,31.22 0 bottom
U$13  LSM303HAND  [LGA14_HAND]  15.15,74.97 90 bottom
U$14  BMP085  [BMP085]  22.44,73.94 270 bottom
U$15  4WIRE_CONN  [4WIRE_PIN]  20.92,80.22 0 bottom
U$16  4WIRE_CONN  [4WIRE_PIN]  18.38,80.22 0 top
U$17  4WIRE_CONN  [4WIRE_PIN]  8.96,80.22 0 bottom
U$18  AT32UC3B0  [JEDEC_MS-026]  56.2,63.38 0 bottom
U$19  UBB_MICRO_HIROSE  [USB_MICRO]  49.9,82.1 180 top
U$20  L3G4200DHAND  [LGA16_HAND]  44.77,69.75 0 bottom
U$21  LSM303HAND  [LGA14_HAND]  53.15,74.97 90 bottom
U$22  BMP085  [BMP085]  60.44,73.94 270 bottom
U$23  4WIRE_CONN  [4WIRE_PIN]  58.92,80.22 0 bottom
U$24  4WIRE_CONN  [4WIRE_PIN]  56.38,80.22 0 top
U$25  4WIRE_CONN  [4WIRE_PIN]  46.96,80.22 0 bottom
U$26  AT32UC3B0  [JEDEC_MS-026]  56.2,14.38 0 bottom
U$27  UBB_MICRO_HIROSE  [USB_MICRO]  49.9,33.1 180 top
U$28  L3G4200DHAND  [LGA16_HAND]  44.77,20.75 0 bottom
U$29  LSM303HAND  [LGA14_HAND]  53.15,25.98 90 bottom
U$30  BMP085  [BMP085]  60.44,24.93 270 bottom
U$31  4WIRE_CONN  [4WIRE_PIN]  58.92,31.22 0 bottom
U$32  4WIRE_CONN  [4WIRE_PIN]  56.38,31.22 0 top
U$33  4WIRE_CONN  [4WIRE_PIN]  46.96,31.22 0 bottom
U$34  ISPSMD  [ISP_SMD]  95.31,53.56 90 bottom
U$35  ISPSMD  [ISP_SMD]  95.31,28.56 90 bottom

## Library data of the parts
C1 C5-C7 C14 C24 C26 C28-C30 C33 C35 C37-C39 C42 C44 C46-C48 CA1 CA5 CA9 CA13 CP1 CP2 CP4-CP10 CP12-CP16 CP18-CP22 CP24 CPR CPR1-CPR3 CR1 CR5 CR8 CR11 = rcl; MF: KEMET; MPN: C0402C104K4RAC AUTO; OC_FARNELL: 2070374
C2 C3 C8-C11 C16-C21 C49-C72 R4 R5 R10 R12 R14 R16 R18 R20-R36 R73-R135 = rcl
C4 C12 C13 C15 C22 C23 C25 C27 C31 C32 C34 C36 C40 C41 C43 C45 CA4 CA8 CA12 CA16 CP3 CP11 CP17 CP23 CR3 CR6 CR9 CR12 = rcl; MF: MURATA; MPN: GRM188R61C225KE15D; OC_FARNELL: 1735526
CA2 CA6 CA10 CA14 CU1-CU4 = rcl; MF: MURATA; MPN: GRM219R61C475KE15D; OC_FARNELL: 1845746
CA3 CA7 CA11 CA15 = rcl; MF: KEMET; MPN: C0402C224K9PACTU; OC_FARNELL: 1572610
CQ1-CQ8 = rcl; MF: MURATA; MPN: GRM1885C1H180JA01D; OC_FARNELL: 1828908
CR2 CR4 CR7 CR10 = rcl; MF: MULTICOMP; MPN: MCCA000076; OC_FARNELL: 1758924
IC1 IC4 IC6 = atmel; MPN: ATMEGA8-16AU; OC_FARNELL: 9171371; OC_NEWARK: 73M8863
IC2 IC3 IC5 = v-reg-micrel; OC_FARNELL: unknown; OC_NEWARK: unknown
IN1-IN3 U$2 U$34 U$35 = Fabi
LED1 LED4 LED7 LED10 = led; MF: AVAGO TECHNOLOGIES; MPN: ASMT-RR45-AQ902; OC_FARNELL: 1652080
LED2 LED5 LED8 LED11 = led; MF: AVAGO TECHNOLOGIES; MPN: ASMT-RF45-AN002; OC_FARNELL: 1652078
LED3 LED6 LED9 LED12 = led; MF: ROHM; MPN: SMLE12BC7TT86Q; OC_FARNELL: 1685096
M1-M36 SV2 SV4 SV6-SV15 = Fabian
OK1 OK6 OK8 OK10 = optocoupler; MF: AVAGO TECHNOLOGIES; MPN: ACPL-247-500E; OC_FARNELL: 1634758; OC_NEWARK: unknown
OK2 OK4 OK5 OK12-OK17 = optocoupler; OC_FARNELL: unknown; OC_NEWARK: unknown
OK3 OK7 OK9 OK11 = optocoupler; MF: AVAGO TECHNOLOGIES; MPN: ACPL-217-500E; OC_FARNELL: 1602614; OC_NEWARK: unknown
Q1-Q4 = crystal; MF: ABRACON; MPN: ABMM2-8.000MHZ-E2-T; OC_FARNELL: 1611803; OC_NEWARK: unknown
R1 R2 R37 R38 R49 R50 R61 R62 = rcl; MF: YAGEO (PHYCOMP); MPN: RC0603FR-0739RL; OC_FARNELL: 9238310
R3 R6-R9 R39-R43 R51-R55 R63-R67 RS1-RS8 = rcl; MF: MULTICOMP; MPN: MC 0.063W 0603 1% 10K; OC_FARNELL: 9330399
R11 R13 R15 R17 R19 R44-R48 R56-R60 R68-R72 RL1-RL6 RL8-RL10 RL12-RL14 = rcl; MF: VISHAY DRALORIC; MPN: CRCW0603330RFKEA; OC_FARNELL: 1469803
RL RL7 RL11 RL15 = rcl; OC_FARNELL: unknown
RST RST1-RST3 TCK TCK1-TCK3 TDI TDI1-TDI3 TDO TDO1-TDO3 TMS TMS1-TMS3 TP1-TP24 TP27-TP98 = testpad; OC_FARNELL: unknown
SV1 SV3 SV5 = con-lstb; OC_FARNELL: unknown; OC_NEWARK: unknown
T1 T3-T5 = Fabian; BEST: Farnell 1525470 od 1700713; MF: FAIRCHILD SEMICONDUCTOR; MPN: FDC6312P; OC_FARNELL: 1700713
T2 T6 T7 = transistor
TP25 TP26 TP99-TP108 = testpad
U1-U4 = Fabian; MF: MICROCHIP; MPN: MCP1824ST-3302E/DB; OC_FARNELL: 1578379; OC_NEWARK: 05N1293; PACKAGE: SOT-223-3; SUPPLIER: Microchip
U$1 U$3 U$18 U$26 = UC3Bxxxx; MF: ATMEL; MPN: AT32UC3B0256-A2UT; OC_FARNELL: 1715453
U$4 U$6 U$19 U$27 = Fabian; MF: HRS (HIROSE); MPN: ZX62-B-5PA(11); OC_FARNELL: 1645325
U$5 U$8 U$20 U$28 = st-Gyro; OC_FARNELL: unknown
U$7 U$13 U$21 U$29 = ST Accelometer; MF: STMICROELECTRONICS; MPN: LSM303DLHC; OC_FARNELL: 2068595
U$9 U$14 U$22 U$30 = SparkFun; OC_FARNELL: unknown
U$10-U$12 U$15-U$17 U$23-U$25 U$31-U$33 = Fabian; OC_FARNELL: unknown

## Nets
0V: C2.- C3.2 C8.2 C9.2 C10.- C11.2 C16.2 C17.2 C18.2 C19.2 C20.2 C21.2 IC1.3 IC1.5 IC1.21 IC2.2 OK2.2 R20.1 R22.1 R24.1 R26.1 R28.1 R30.1 R36.1 SV3.1 U$2.GND
0V1: C49.2 C50.- C51.2 C52.- C53.2 C54.2 C55.2 C56.2 C57.2 C58.2 C59.2 C60.2 IC3.2 IC4.3 IC4.5 IC4.21 OK12.2 R75.1 R77.1 R79.1 R81.1 R83.1 R85.1 R91.1 SV1.1 U$34.GND
0V2: C61.2 C62.- C63.2 C64.- C65.2 C66.2 C67.2 C68.2 C69.2 C70.2 C71.2 C72.2 IC5.2 IC6.3 IC6.5 IC6.21 OK15.2 R99.1 R101.1 R103.1 R105.1 R107.1 R109.1 R115.1 SV5.1 U$35.GND
1V1: CP7.1 CP8.1 CP11.1 U$3.P8 U$3.P20 U$3.P22 U$3.P53 U$3.P56
1V2: CP13.1 CP14.1 CP17.1 U$18.P8 U$18.P20 U$18.P22 U$18.P53 U$18.P56
1V3: CP19.1 CP20.1 CP23.1 U$26.P8 U$26.P20 U$26.P22 U$26.P53 U$26.P56
1V6: CP1.1 CP2.1 CP3.1 U$1.P8 U$1.P20 U$1.P22 U$1.P53 U$1.P56
+3V1 [power]: C22.1 C26.1 C29.1 CP9.1 CP10.1 CP12.1 RL7.1 RS3.2 RS4.2 T3.P$2 T3.P$5 U2.3 U$3.P18 U$3.P19 U$3.P21 U$3.P32 U$3.P48 U$3.P64 U$15.4 U$16.1
+3V2 [power]: C31.1 C35.1 C38.1 CP15.1 CP16.1 CP18.1 RL11.1 RS5.2 RS6.2 T4.P$2 T4.P$5 U3.3 U$18.P18 U$18.P19 U$18.P21 U$18.P32 U$18.P48 U$18.P64 U$23.4 U$24.1
+3V3 [power]: C1.1 C6.1 C12.1 CP4.1 CP5.1 CP6.1 RL.1 RS1.2 RS2.2 T1.P$2 T1.P$5 U1.3 U$1.P18 U$1.P19 U$1.P21 U$1.P32 U$1.P48 U$1.P64 U$10.4 U$11.1
+3V4 [power]: C40.1 C44.1 C47.1 CP21.1 CP22.1 CP24.1 RL15.1 RS7.2 RS8.2 T5.P$2 T5.P$5 U4.3 U$26.P18 U$26.P19 U$26.P21 U$26.P32 U$26.P48 U$26.P64 U$31.4 U$32.1
+5V [power]: C4.1 C5.1 C7.1 C15.1 TP12.TP TP24.TP U1.1 U$12.4
+5V1 [power]: C2.+ IC2.1 IC2.3 R29.2 SV3.7
+5V2 [power]: C25.1 C27.1 C28.1 C30.1 TP38.TP TP50.TP U2.1 U$17.4
+5V3 [power]: C34.1 C36.1 C37.1 C39.1 TP62.TP TP74.TP U3.1 U$25.4
+5V4 [power]: C43.1 C45.1 C46.1 C48.1 TP86.TP TP98.TP U4.1 U$33.4
+5V5 [power]: C50.+ IC3.1 IC3.3 R84.2 SV1.7
+5V6 [power]: C62.+ IC5.1 IC5.3 R108.2 SV5.7
CS_R: U$1.P59 U$5.5
CS_R1: U$3.P59 U$8.5
CS_R2: U$18.P59 U$20.5
CS_R3: U$26.P59 U$28.5
DM: R2.1 U$1.P51
DM1: R38.1 U$3.P51
DM2: R50.1 U$18.P51
DM3: R62.1 U$26.P51
DM_1: R2.2 U$4.P$2
DM_2: R38.2 U$6.P$2
DM_3: R50.2 U$19.P$2
DM_4: R62.2 U$27.P$2
DP: R1.1 U$1.P50
DP1: R37.1 U$3.P50
DP2: R49.1 U$18.P50
DP3: R61.1 U$26.P50
DP_1: R1.2 U$4.P$3
DP_2: R37.2 U$6.P$3
DP_3: R49.2 U$19.P$3
DP_4: R61.2 U$27.P$3
GND [power]: C1.2 C4.2 C5.2 C6.2 C7.2 C12.2 C13.2 C14.2 C15.2 CA1.2 CA2.2 CA4.2 CP1.2 CP2.2 CP3.2 CP4.2 CP5.2 CP6.2 CPR.2 CQ1.1 CQ2.1 CR1.2 CR2.1 CR3.2 CU1.2 OK1.2 OK1.4 OK1.6 OK1.8 OK3.2 RL1.1 RL2.1 RL3.1 TP13.TP U1.2 U1.4 U$1.P1 U$1.P17 U$1.P23 U$1.P49 U$4.P$5 U$4.P$6 U$4.P$7 U$4.P$8 U$4.P$9 U$4.P$10 U$4.P$11 U$5.8 U$5.9 U$5.10 U$5.11 U$5.12 U$5.13 U$7.7 U$7.10 U$7.11 U$9.1 U$10.1 U$11.4 U$12.1
GND1 [power]: M1.3 SV8.3 TP26.TP
GND2 [power]: C22.2 C23.2 C24.2 C25.2 C26.2 C27.2 C28.2 C29.2 C30.2 CA5.2 CA6.2 CA8.2 CP7.2 CP8.2 CP9.2 CP10.2 CP11.2 CP12.2 CPR1.2 CQ3.1 CQ4.1 CR4.1 CR5.2 CR6.2 CU2.2 OK6.2 OK6.4 OK6.6 OK6.8 OK7.2 RL4.1 RL5.1 RL6.1 TP39.TP U2.2 U2.4 U$3.P1 U$3.P17 U$3.P23 U$3.P49 U$6.P$5 U$6.P$6 U$6.P$7 U$6.P$8 U$6.P$9 U$6.P$10 U$6.P$11 U$8.8 U$8.9 U$8.10 U$8.11 U$8.12 U$8.13 U$13.7 U$13.10 U$13.11 U$14.1 U$15.1 U$16.4 U$17.1
GND3 [power]: C31.2 C32.2 C33.2 C34.2 C35.2 C36.2 C37.2 C38.2 C39.2 CA9.2 CA10.2 CA12.2 CP13.2 CP14.2 CP15.2 CP16.2 CP17.2 CP18.2 CPR2.2 CQ5.1 CQ6.1 CR7.1 CR8.2 CR9.2 CU3.2 OK8.2 OK8.4 OK8.6 OK8.8 OK9.2 RL8.1 RL9.1 RL10.1 TP63.TP U3.2 U3.4 U$18.P1 U$18.P17 U$18.P23 U$18.P49 U$19.P$5 U$19.P$6 U$19.P$7 U$19.P$8 U$19.P$9 U$19.P$10 U$19.P$11 U$20.8 U$20.9 U$20.10 U$20.11 U$20.12 U$20.13 U$21.7 U$21.10 U$21.11 U$22.1 U$23.1 U$24.4 U$25.1
GND4 [power]: C40.2 C41.2 C42.2 C43.2 C44.2 C45.2 C46.2 C47.2 C48.2 CA13.2 CA14.2 CA16.2 CP19.2 CP20.2 CP21.2 CP22.2 CP23.2 CP24.2 CPR3.2 CQ7.1 CQ8.1 CR10.1 CR11.2 CR12.2 CU4.2 OK10.2 OK10.4 OK10.6 OK10.8 OK11.2 RL12.1 RL13.1 RL14.1 TP87.TP U4.2 U4.4 U$26.P1 U$26.P17 U$26.P23 U$26.P49 U$27.P$5 U$27.P$6 U$27.P$7 U$27.P$8 U$27.P$9 U$27.P$10 U$27.P$11 U$28.8 U$28.9 U$28.10 U$28.11 U$28.12 U$28.13 U$29.7 U$29.10 U$29.11 U$30.1 U$31.1 U$32.4 U$33.1
GND5 [power]: M11.3 SV4.3 TP100.TP
GND6 [power]: M17.3 SV9.3 TP102.TP
GND7 [power]: M23.3 SV11.3 TP104.TP
GND8 [power]: M29.3 SV13.3 TP106.TP
GND9 [power]: M35.3 SV15.3 TP108.TP
INT_A: U$1.P11 U$7.5
INT_A1: U$3.P11 U$13.5
INT_A2: U$18.P11 U$21.5
INT_A3: U$26.P11 U$29.5
INT_R: U$1.P24 U$5.6
INT_R1: U$3.P24 U$8.6
INT_R2: U$18.P24 U$20.6
INT_R3: U$26.P24 U$28.6
LED1: LED1.A U$1.P44
LED2: LED4.A U$3.P44
LED3: LED7.A U$18.P44
LED4: LED10.A U$26.P44
MISO: U$1.P41 U$5.4
MISO1: IC1.16 U$2.MISO
MISO2: U$3.P41 U$8.4
MISO3: U$18.P41 U$20.4
MISO4: U$26.P41 U$28.4
MISO5: IC4.16 U$34.MISO
MISO6: IC6.16 U$35.MISO
MOSI: U$1.P42 U$5.3
MOSI1: IC1.15 U$2.MOSI
MOSI2: U$3.P42 U$8.3
MOSI3: U$18.P42 U$20.3
MOSI4: U$26.P42 U$28.3
MOSI5: IC4.15 U$34.MOSI
MOSI6: IC6.15 U$35.MOSI
N$1: LED1.C RL1.2
N$2: RST.TP U$1.P63
N$3: CA3.1 U$7.13
N$4: LED2.C RL2.2
N$5: LED3.C RL3.2
N$6: LED2.A U$1.P45
N$7: LED3.A U$1.P46
N$8: CR2.2 U$5.14
N$9: U$1.P9
N$10: CA2.1 U$7.6
N$11: CA3.2 U$7.12
N$12: R3.2 TP15.TP
N$13 [power]: C13.1 C14.1 T1.P$4 T1.P$6 TP14.TP
N$14: R6.2 TP16.TP
N$15: R7.2 TP17.TP
N$16: R8.2 TP18.TP
N$17: U$1.P10
N$18: OK1.1 R11.2 TP23.TP
N$19: OK1.3 R13.2 TP22.TP
N$20: U$1.P13
N$21: U$1.P14
N$22: OK1.5 R15.2 TP21.TP
N$23: M2.3 R4.2
N$24: U$1.P37
N$25: M2.1 R4.1
N$26: OK1.7 R17.2 TP20.TP
N$27 [power]: M3.3 R5.2
N$28: M3.1 R5.1
N$29: M4.3 R10.2
N$30: OK3.1 R19.2 TP19.TP
N$31: M4.1 R10.1
N$32: M5.3 R12.2
N$33: M5.1 R12.1
N$34 [power]: SV7.3 TP25.TP
N$35: M6.3 R14.2
N$36: M6.1 R14.1
N$37: SV8.1
N$38: SV8.2
N$39: SV7.2
N$40: SV7.1
N$41: RST1.TP U$3.P63
N$42: CR4.2 U$8.14
N$43: LED5.A U$3.P45
N$44: LED6.A U$3.P46
N$45: CA6.1 U$13.6
N$46: CA7.1 U$13.13
N$47: CA7.2 U$13.12
N$48 [power]: C23.1 C24.1 T3.P$4 T3.P$6 TP40.TP
N$49: R39.2 TP41.TP
N$50: R40.2 TP42.TP
N$51: R41.2 TP43.TP
N$52: C8.1 IC2.4
N$53: C19.1 IC1.23 R29.1 R30.2
N$54: IC1.30 OK5.3 R36.2
N$55: IC1.31 OK4.2
N$56 [power]: R18.2 SV3.2
N$57 [power]: R21.2 SV3.3
N$58 [power]: R23.2 SV3.4
N$59 [power]: R25.2 SV3.5
N$60 [power]: R27.2 SV3.6
N$61: C11.1 IC1.27 R21.1 R22.2
N$62: C16.1 IC1.26 R23.1 R24.2
N$63: C17.1 IC1.25 R25.1 R26.2
N$64: C9.1 IC1.28 R18.1 R20.2
N$65: C18.1 IC1.24 R27.1 R28.2
N$66 [isol]: IN3.0V OK4.3 T2.E
N$67 [isol]: IN3.SIG R31.1 R33.2
N$68 [isol]: IN3.5V OK2.4 OK4.4 R32.2
N$69 [isol]: OK2.3 R31.2
N$70 [isol]: OK5.1 R32.1
N$71 [isol]: OK5.2 T2.C
N$72 [isol]: R33.1 T2.B
N$73: OK4.1 R35.1
N$74: IC1.32 R34.2
N$75: OK2.1 R34.1
N$76: C21.1 IC1.20
N$77: R42.2 TP44.TP
N$78: OK6.1 R44.2 TP49.TP
N$79: OK6.3 R45.2 TP48.TP
N$80: OK6.5 R46.2 TP47.TP
N$81: OK6.7 R47.2 TP46.TP
N$82: OK7.1 R48.2 TP45.TP
N$83: LED4.C RL4.2
N$84: LED5.C RL5.2
N$85: LED6.C RL6.2
N$86: U$3.P9
N$87: U$3.P10
N$88: U$3.P13
N$89: U$3.P14
N$90: U$3.P37
N$91: RST2.TP U$18.P63
N$92: CR7.2 U$20.14
N$93: LED8.A U$18.P45
N$94: LED9.A U$18.P46
N$95: CA10.1 U$21.6
N$96: CA11.1 U$21.13
N$97: CA11.2 U$21.12
N$98 [power]: C32.1 C33.1 T4.P$4 T4.P$6 TP64.TP
N$99: R51.2 TP65.TP
N$100: R52.2 TP66.TP
N$101: R53.2 TP67.TP
N$102: R54.2 TP68.TP
N$103: OK8.1 R56.2 TP73.TP
N$104: OK8.3 R57.2 TP72.TP
N$105: OK8.5 R58.2 TP71.TP
N$106: OK8.7 R59.2 TP70.TP
N$107: OK9.1 R60.2 TP69.TP
N$108: LED7.C RL8.2
N$109: LED8.C RL9.2
N$110: LED9.C RL10.2
N$111: U$18.P9
N$112: U$18.P10
N$113: U$18.P13
N$114: U$18.P14
N$115: U$18.P37
N$116: RST3.TP U$26.P63
N$117: CR10.2 U$28.14
N$118: LED11.A U$26.P45
N$119: LED12.A U$26.P46
N$120: CA14.1 U$29.6
N$121: CA15.1 U$29.13
N$122: CA15.2 U$29.12
N$123 [power]: C41.1 C42.1 T5.P$4 T5.P$6 TP88.TP
N$124: R63.2 TP89.TP
N$125: R64.2 TP90.TP
N$126: R65.2 TP91.TP
N$127: R66.2 TP92.TP
N$128: OK10.1 R68.2 TP97.TP
N$129: OK10.3 R69.2 TP96.TP
N$130: OK10.5 R70.2 TP95.TP
N$131: OK10.7 R71.2 TP94.TP
N$132: OK11.1 R72.2 TP93.TP
N$133: LED10.C RL12.2
N$134: LED11.C RL13.2
N$135: LED12.C RL14.2
N$136: U$26.P9
N$137: U$26.P10
N$138: U$26.P13
N$139: U$26.P14
N$140: U$26.P37
N$141: C51.1 IC3.4
N$142: C58.1 IC4.23 R84.1 R85.2
N$143: IC4.30 OK14.3 R91.2
N$144: IC4.31 OK13.2
N$145 [power]: R74.2 SV1.2
N$146 [power]: R76.2 SV1.3
N$147 [power]: R78.2 SV1.4
N$148 [power]: R80.2 SV1.5
N$149 [power]: R82.2 SV1.6
N$150: C54.1 IC4.27 R76.1 R77.2
N$151: C55.1 IC4.26 R78.1 R79.2
N$152: C56.1 IC4.25 R80.1 R81.2
N$153: C53.1 IC4.28 R74.1 R75.2
N$154: C57.1 IC4.24 R82.1 R83.2
N$155 [isol]: IN1.0V OK13.3 T6.E
N$156 [isol]: IN1.SIG R86.1 R88.2
N$157 [isol]: IN1.5V OK12.4 OK13.4 R87.2
N$158 [isol]: OK12.3 R86.2
N$159 [isol]: OK14.1 R87.1
N$160 [isol]: OK14.2 T6.C
N$161 [isol]: R88.1 T6.B
N$162: OK13.1 R90.1
N$163: IC4.32 R89.2
N$164: OK12.1 R89.1
N$165: C60.1 IC4.20
N$166: M7.3 R92.2
N$167: M7.1 R92.1
N$168 [power]: M8.3 R93.2
N$169: M8.1 R93.1
N$170: M9.3 R94.2
N$171: M9.1 R94.1
N$172: M10.3 R95.2
N$173: M10.1 R95.1
N$174 [power]: SV2.3 TP99.TP
N$175: M12.3 R96.2
N$176: M12.1 R96.1
N$177: SV4.1
N$178: SV4.2
N$179: SV2.2
N$180: SV2.1
N$181: C63.1 IC5.4
N$182: C70.1 IC6.23 R108.1 R109.2
N$183: IC6.30 OK17.3 R115.2
N$184: IC6.31 OK16.2
N$185 [power]: R98.2 SV5.2
N$186 [power]: R100.2 SV5.3
N$187 [power]: R102.2 SV5.4
N$188 [power]: R104.2 SV5.5
N$189 [power]: R106.2 SV5.6
N$190: C66.1 IC6.27 R100.1 R101.2
N$191: C67.1 IC6.26 R102.1 R103.2
N$192: C68.1 IC6.25 R104.1 R105.2
N$193: C65.1 IC6.28 R98.1 R99.2
N$194: C69.1 IC6.24 R106.1 R107.2
N$195 [isol]: IN2.0V OK16.3 T7.E
N$196 [isol]: IN2.SIG R110.1 R112.2
N$197 [isol]: IN2.5V OK15.4 OK16.4 R111.2
N$198 [isol]: OK15.3 R110.2
N$199 [isol]: OK17.1 R111.1
N$200 [isol]: OK17.2 T7.C
N$201 [isol]: R112.1 T7.B
N$202: OK16.1 R114.1
N$203: IC6.32 R113.2
N$204: OK15.1 R113.1
N$205: C72.1 IC6.20
N$206: M13.3 R116.2
N$207: M13.1 R116.1
N$208 [power]: M14.3 R117.2
N$209: M14.1 R117.1
N$210: M15.3 R118.2
N$211: M15.1 R118.1
N$212: M16.3 R119.2
N$213: M16.1 R119.1
N$214 [power]: SV6.3 TP101.TP
N$215: M18.3 R120.2
N$216: M18.1 R120.1
N$217: SV9.1
N$218: SV9.2
N$219: SV6.2
N$220: SV6.1
N$221: M19.3 R121.2
N$222: M19.1 R121.1
N$223 [power]: M20.3 R122.2
N$224: M20.1 R122.1
N$225: M21.3 R123.2
N$226: M21.1 R123.1
N$227: M22.3 R124.2
N$228: M22.1 R124.1
N$229 [power]: SV10.3 TP103.TP
N$230: M24.3 R125.2
N$231: M24.1 R125.1
N$232: SV11.1
N$233: SV11.2
N$234: SV10.2
N$235: SV10.1
N$236: M25.3 R126.2
N$237: M25.1 R126.1
N$238 [power]: M26.3 R127.2
N$239: M26.1 R127.1
N$240: M27.3 R128.2
N$241: M27.1 R128.1
N$242: M28.3 R129.2
N$243: M28.1 R129.1
N$244 [power]: SV12.3 TP105.TP
N$245: M30.3 R130.2
N$246: M30.1 R130.1
N$247: SV13.1
N$248: SV13.2
N$249: SV12.2
N$250: SV12.1
N$251: M31.3 R131.2
N$252: M31.1 R131.1
N$253 [power]: M32.3 R132.2
N$254: M32.1 R132.1
N$255: M33.3 R133.2
N$256: M33.1 R133.1
N$257: M34.3 R134.2
N$258: M34.1 R134.1
N$259 [power]: SV14.3 TP107.TP
N$260: M36.3 R135.2
N$261: M36.1 R135.1
N$262: SV15.1
N$263: SV15.2
N$264: SV14.2
N$265: SV14.1
NRESET: IC1.29 R16.1 U$2.RESET
NRESET1: IC4.29 R73.1 U$34.RESET
NRESET2: IC6.29 R97.1 U$35.RESET
PWM1: R9.1 U$1.P30
PWM2: R11.1 U$1.P31
PWM3: R13.1 U$1.P33
PWM4: R15.1 U$1.P60
PWM5: R17.1 U$1.P36
PWM6: R19.1 U$1.P16
PWM7: R45.1 U$3.P33
PWM8: R46.1 U$3.P60
PWM9: R47.1 U$3.P36
PWM10: R48.1 U$3.P16
PWM11: R43.1 U$3.P30
PWM12: R44.1 U$3.P31
PWM13: R57.1 U$18.P33
PWM14: R58.1 U$18.P60
PWM15: R59.1 U$18.P36
PWM16: R60.1 U$18.P16
PWM17: R55.1 U$18.P30
PWM18: R56.1 U$18.P31
PWM19: R69.1 U$26.P33
PWM20: R70.1 U$26.P60
PWM21: R71.1 U$26.P36
PWM22: R72.1 U$26.P16
PWM23: R67.1 U$26.P30
PWM24: R68.1 U$26.P31
RC1: R40.1 U$3.P12
RC1-RX1: R3.1 U$1.P25
RC1-RX2: R39.1 U$3.P25
RC1-RX3: R51.1 U$18.P25
RC1-RX4: R63.1 U$26.P25
RC2: R6.1 U$1.P12
RC3: R7.1 U$1.P34
RC4: R8.1 U$1.P47
RC5: R41.1 U$3.P34
RC6: R42.1 U$3.P47
RC7: R52.1 U$18.P12
RC8: R53.1 U$18.P34
RC9: R54.1 U$18.P47
RC10: R64.1 U$26.P12
RC11: R65.1 U$26.P34
RC12: R66.1 U$26.P47
RX_SW: T1.P$1 T1.P$3 U$1.P15
RX_SW1: T3.P$1 T3.P$3 U$3.P15
RX_SW2: T4.P$1 T4.P$3 U$18.P15
RX_SW3: T5.P$1 T5.P$3 U$26.P15
S1S: R9.2 TP11.TP
S1S1: R43.2 TP37.TP
S1S2: R55.2 TP61.TP
S1S3: R67.2 TP85.TP
S2+: OK1.16 TP10.TP
S2+1: OK6.16 TP36.TP
S2+2: OK8.16 TP60.TP
S2+3: OK10.16 TP84.TP
S2S: OK1.15 TP9.TP
S2S1: OK6.15 TP35.TP
S2S2: OK8.15 TP59.TP
S2S3: OK10.15 TP83.TP
S3+: OK1.14 TP8.TP
S3+1: OK6.14 TP34.TP
S3+2: OK8.14 TP58.TP
S3+3: OK10.14 TP82.TP
S3S: OK1.13 TP7.TP
S3S1: OK6.13 TP33.TP
S3S2: OK8.13 TP57.TP
S3S3: OK10.13 TP81.TP
S4+: OK1.12 TP6.TP
S4+1: OK6.12 TP32.TP
S4+2: OK8.12 TP56.TP
S4+3: OK10.12 TP80.TP
S4S: OK1.11 TP5.TP
S4S1: OK6.11 TP31.TP
S4S2: OK8.11 TP55.TP
S4S3: OK10.11 TP79.TP
S5+: OK1.10 TP4.TP
S5+1: OK6.10 TP30.TP
S5+2: OK8.10 TP54.TP
S5+3: OK10.10 TP78.TP
S5S: OK1.9 TP3.TP
S5S1: OK6.9 TP29.TP
S5S2: OK8.9 TP53.TP
S5S3: OK10.9 TP77.TP
S6+: OK3.4 TP2.TP
S6+1: OK7.4 TP28.TP
S6+2: OK9.4 TP52.TP
S6+3: OK11.4 TP76.TP
S6S: OK3.3 TP1.TP
S6S1: OK7.3 TP27.TP
S6S2: OK9.3 TP51.TP
S6S3: OK11.3 TP75.TP
SCK: U$1.P35 U$5.2
SCK1: IC1.17 U$2.SCK
SCK2: U$3.P35 U$8.2
SCK3: U$18.P35 U$20.2
SCK4: U$26.P35 U$28.2
SCK5: IC4.17 U$34.SCK
SCK6: IC6.17 U$35.SCK
SCL: RS1.1 U$1.P28 U$7.2 U$9.6
SCL1: RS3.1 U$3.P28 U$13.2 U$14.6
SCL2: RS5.1 U$18.P28 U$21.2 U$22.6
SCL3: RS7.1 U$26.P28 U$29.2 U$30.6
SDA: RS2.1 U$1.P29 U$7.3 U$9.7
SDA1: RS4.1 U$3.P29 U$13.3 U$14.7
SDA2: RS6.1 U$18.P29 U$21.3 U$22.7
SDA3: RS8.1 U$26.P29 U$29.3 U$30.7
TCA0: U$1.P6 U$12.3
TCA1: U$3.P6 U$17.3
TCA2: U$18.P6 U$25.3
TCA3: U$26.P6 U$33.3
TCB0: U$1.P7 U$12.2
TCB1: U$3.P7 U$17.2
TCB2: U$18.P7 U$25.2
TCB3: U$26.P7 U$33.2
TCK: TCK.TP U$1.P2
TCK1: TCK1.TP U$3.P2
TCK2: TCK2.TP U$18.P2
TCK3: TCK3.TP U$26.P2
TDI: TDI.TP U$1.P3
TDI1: TDI1.TP U$3.P3
TDI2: TDI2.TP U$18.P3
TDI3: TDI3.TP U$26.P3
TDO: TDO.TP U$1.P4
TDO1: TDO1.TP U$3.P4
TDO2: TDO2.TP U$18.P4
TDO3: TDO3.TP U$26.P4
TMS: TMS.TP U$1.P5
TMS1: TMS1.TP U$3.P5
TMS2: TMS2.TP U$18.P5
TMS3: TMS3.TP U$26.P5
UART0_RX: U$1.P57 U$11.3
UART0_RX1: U$3.P57 U$16.3
UART0_RX2: U$18.P57 U$24.3
UART0_RX3: U$26.P57 U$32.3
UART0_TX: U$1.P58 U$11.2
UART0_TX1: U$3.P58 U$16.2
UART0_TX2: U$18.P58 U$24.2
UART0_TX3: U$26.P58 U$32.2
UART2_RX: U$1.P62 U$10.2
UART2_RX1: U$3.P62 U$15.2
UART2_RX2: U$18.P62 U$23.2
UART2_RX3: U$26.P62 U$31.2
UART2_TX: U$1.P61 U$10.3
UART2_TX1: U$3.P61 U$15.3
UART2_TX2: U$18.P61 U$23.3
UART2_TX3: U$26.P61 U$31.3
VBUS: CU1.1 U$1.P52 U$4.P$1
VBUS1: CU2.1 U$3.P52 U$6.P$1
VBUS2: CU3.1 U$18.P52 U$19.P$1
VBUS3: CU4.1 U$26.P52 U$27.P$1
VCC: C3.1 C10.+ C20.1 IC1.4 IC1.6 IC1.18 IC2.5 OK5.4 R16.2 R35.2 U$2.5V
VCC1: C49.1 C52.+ C59.1 IC3.5 IC4.4 IC4.6 IC4.18 OK14.4 R73.2 R90.2 U$34.5V
VCC2: C61.1 C64.+ C71.1 IC5.5 IC6.4 IC6.6 IC6.18 OK17.4 R97.2 R114.2 U$35.5V
VCCSENS [power]: CA1.1 CA4.1 CPR.1 CR1.1 CR3.1 RL.2 U$5.1 U$5.15 U$5.16 U$7.1 U$7.14 U$9.3 U$9.4
VCCSENS1 [power]: CA5.1 CA8.1 CPR1.1 CR5.1 CR6.1 RL7.2 U$8.1 U$8.15 U$8.16 U$13.1 U$13.14 U$14.3 U$14.4
VCCSENS2 [power]: CA9.1 CA12.1 CPR2.1 CR8.1 CR9.1 RL11.2 U$20.1 U$20.15 U$20.16 U$21.1 U$21.14 U$22.3 U$22.4
VCCSENS3 [power]: CA13.1 CA16.1 CPR3.1 CR11.1 CR12.1 RL15.2 U$28.1 U$28.15 U$28.16 U$29.1 U$29.14 U$30.3 U$30.4
XTAL1: CQ2.2 Q1.3 U$1.P39
XTAL2: CQ1.2 Q1.1 U$1.P40
XTAL3: CQ4.2 Q2.1 U$3.P40
XTAL4: CQ3.2 Q2.3 U$3.P39
XTAL5: CQ6.2 Q3.1 U$18.P40
XTAL6: CQ5.2 Q3.3 U$18.P39
XTAL7: CQ8.2 Q4.1 U$26.P40
XTAL8: CQ7.2 Q4.3 U$26.P39

## Tracks (layer width: path | path; a pad name or v marks a point on that pad's centre or on a via)
0V  (via drill 0.3, 0.3 pad 0.6)
  Top 0.15: 88.16,80.65 88.16,81.16 88.51,81.52 91.66,81.52 91.78,81.49 | C20.2 87.29,70.62 87.29,71.86 87.32,71.89 87.32,71.96 IC1.3
  other vias: 91.66,79.24 91.37,70.52 87.24,78.14 88.83,78.14 87.34,73.18 87.34,67.8 92.32,81.31 90.37,70.42 90.52,73.54 88.18,73.21 87.16,79.13 97.91,77.3 93.15,71.48 94.19,67.88 98.33,79.74 98.18,78.34 98.38,81.16 97.39,65.33
  pour Bottom: 101.66,64.04 77.67,64.04 77.67,81.82 101.66,81.82
  pour Top: 77.6,81.82 101.66,81.82 101.66,64.04 77.6,64.04
0V1  (via drill 0.3, 0.3 pad 0.6)
  Top 0.15: 88.16,56.65 88.16,57.16 88.51,57.52 91.66,57.52 91.78,57.49 | C59.2 87.29,46.62 87.29,47.86 87.32,47.89 87.32,47.96 IC4.3
  other vias: 91.66,55.24 91.37,46.52 87.24,54.14 88.83,54.14 87.34,49.18 87.34,43.8 92.32,57.31 90.37,46.41 90.52,49.54 88.18,49.21 87.16,55.13 97.91,53.3 93.15,47.48 94.19,43.88 98.33,55.74 98.18,54.34 98.38,57.16 97.39,41.34
  pour Bottom: 101.66,40.04 77.67,40.04 77.67,57.82 101.66,57.82
  pour Top: 77.6,57.82 101.66,57.82 101.66,40.04 77.6,40.04
0V2  (via drill 0.3, 0.3 pad 0.6)
  Top 0.15: 88.16,31.65 88.16,32.16 88.51,32.52 91.66,32.52 91.78,32.49 | C71.2 87.29,21.62 87.29,22.86 87.32,22.89 87.32,22.96 IC6.3
  other vias: 91.66,30.24 91.37,21.52 87.24,29.14 88.83,29.14 87.34,24.18 87.34,18.8 92.32,32.31 90.37,21.41 90.52,24.54 88.18,24.21 87.16,30.13 97.91,28.3 93.15,22.48 94.19,18.88 98.33,30.74 98.18,29.34 98.38,32.16 97.39,16.34
  pour Bottom: 101.66,15.04 77.67,15.04 77.67,32.82 101.66,32.82
  pour Top: 77.6,32.82 101.66,32.82 101.66,15.04 77.6,15.04
1V1  (via drill 0.3 pad 0.6)
  Top 0.15: v18.73,67.62 18.95,67.68 19.15,67.47 | 19.15,67.47 19.57,67.05 21.83,67.05 22.5,66.38 22.5,66.37 23.17,65.7 23.17,63.95 22.84,63.76 22.88,63.69 | 22.88,63.69 22.95,63.56 22.95,63.54 | 23.33,63.54 22.95,63.54 | 23.33,63.54 23.44,63.54 CP11.1 | v22.98,63.26 22.95,63.29 22.95,63.54 | 22.88,63.69 22.77,63.32 v22.98,63.26 | 22.88,63.69 23.15,63.41 v22.98,63.26 | 23.33,63.54 22.95,63.48 v22.98,63.26 | 23.33,63.54 23.2,63.18 v22.98,63.26 | 19.15,67.47 18.9,67.77 v18.73,67.62 | 19.15,67.47 18.77,67.4 v18.73,67.62